# Altium PCB PBC2Asave.PcbDoc (part 2 of 2)
Units mm, origin at the board's own origin, x right, y up, seen from the top; angles counter-clockwise.
Board outline 55 x 64.5 mm, 2 copper layers (Top Layer, Bottom Layer); 77 components, 67 nets, 232 pads, 40 vias.
Unrouted connection lines stored in the file: 2.
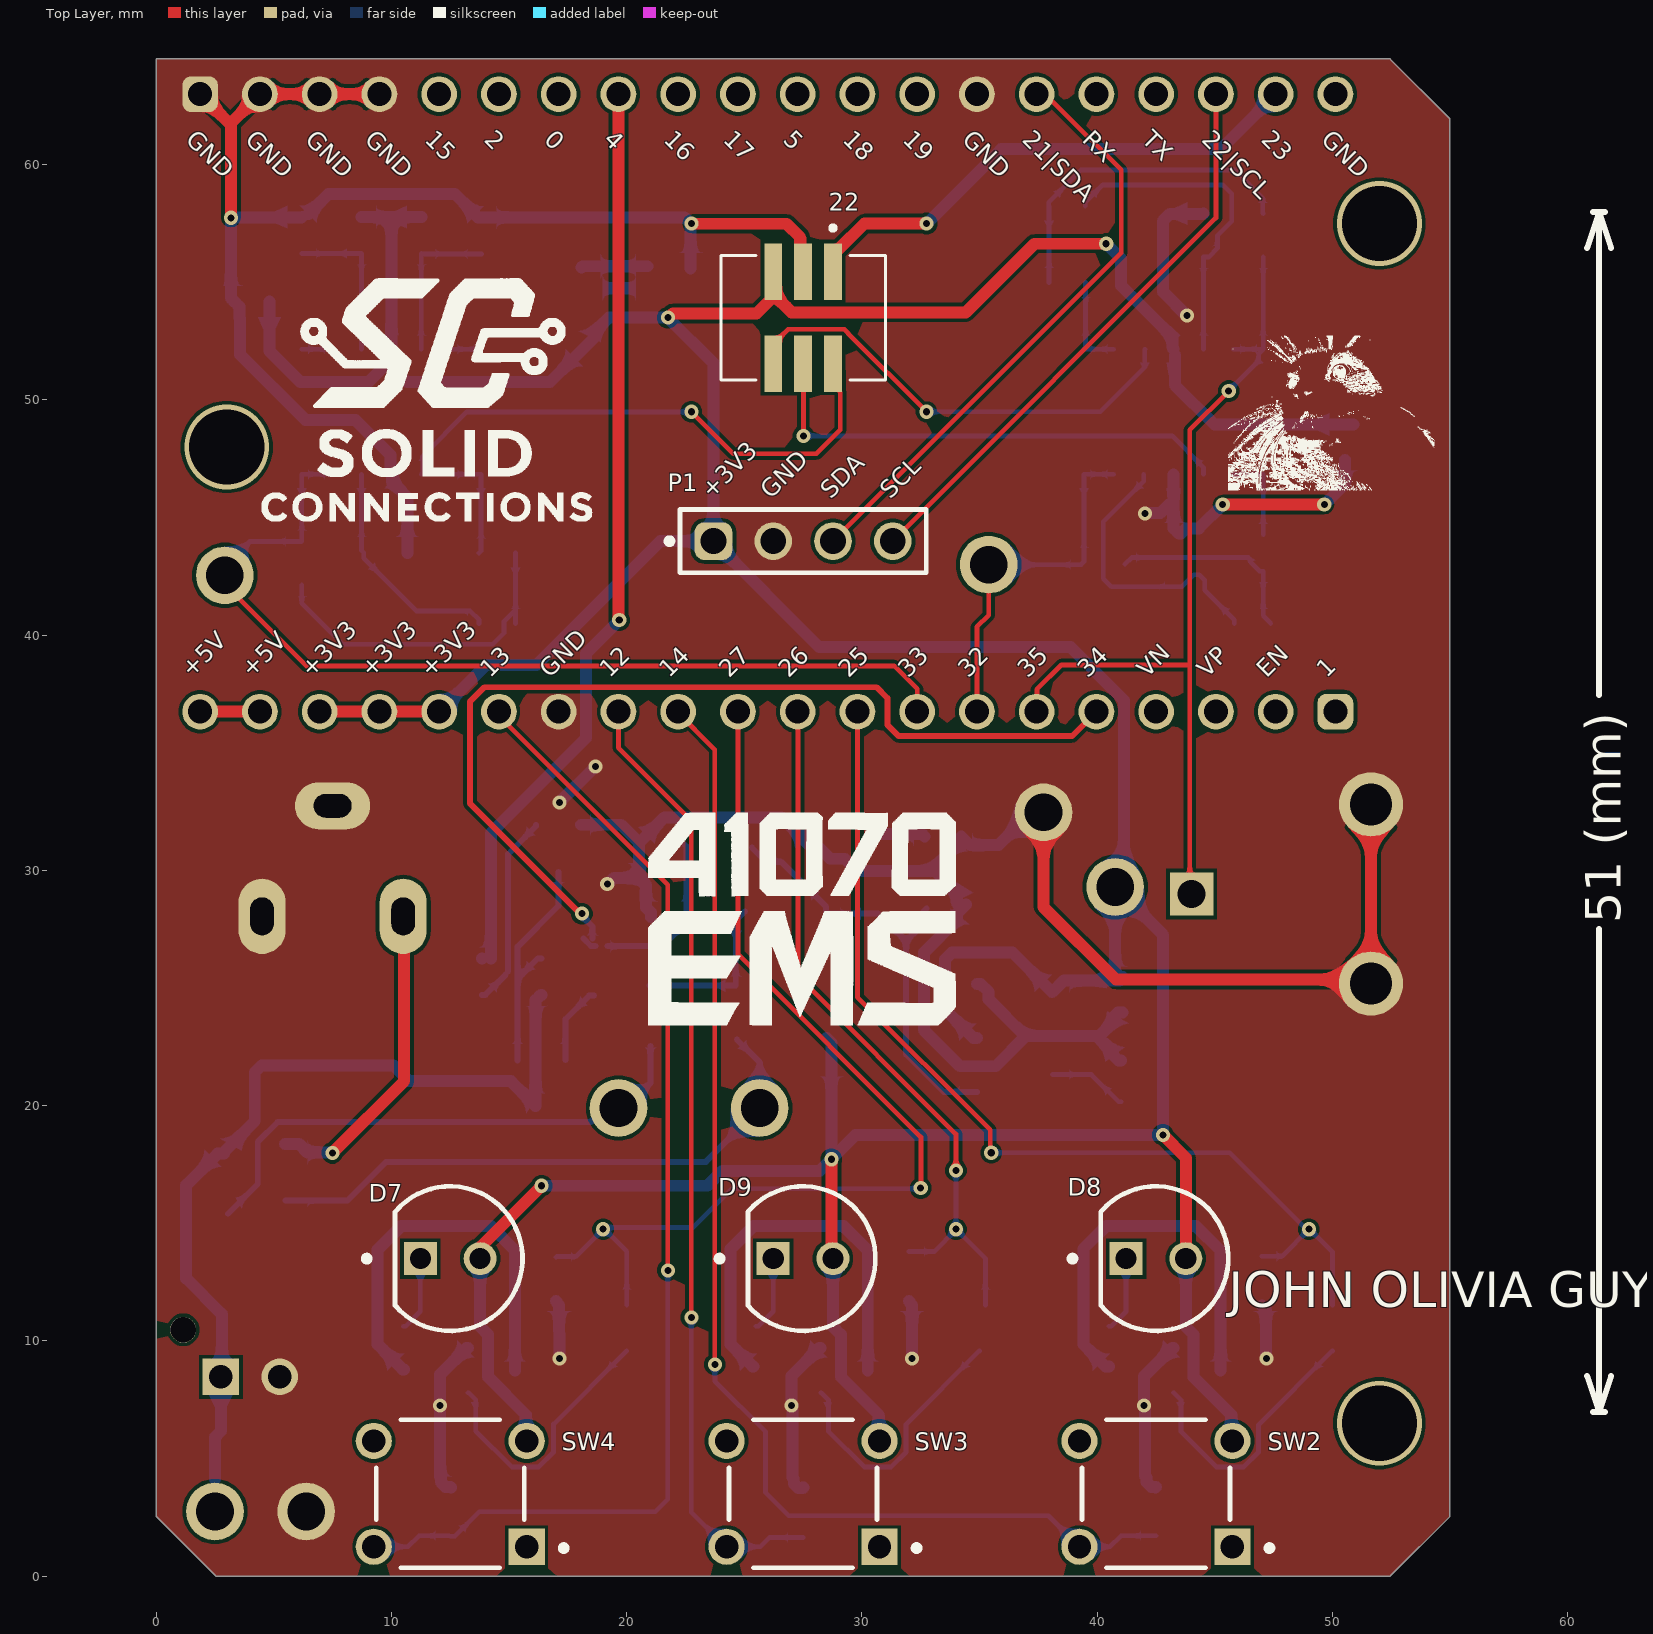
[diagram p0: Top Layer view]

## Via types
v1: diameter 0.6, hole 0.3, Top Layer to Bottom Layer, 37 vias
v2: diameter 3.6, hole 3.2, Top Layer to Bottom Layer, 3 vias

## Nets (pads, with @x,y where several pads share a name; then routed paths per layer and width w, separated by ;. In a path a pad name is that pad's centre, name@x,y a point inside that pad or via, vN(x,y) a via of type N, cw(c..) or ccw(c..) an arc to the next point about the centre after c; other vN are vias at no path point) (continued)
NetJ6_1: (continued)
  Bottom Layer w0.508: SW1.5@5.473,18.376 6.071,18.376 6.435,18.013 7.475,18.013 v1(7.493,17.995)
NetQ1_1: Q1.1 Q2.3 R14.2 | length 10.1
  Bottom Layer w0.254: Q1.1@15.367,21.927 15.367,25.402 ; R14.2 16.229,26.264 15.367,25.402 ; Q2.3 17.102,28.493 15.367,26.758 15.367,25.402
NetQ1_2: Q1.2 R15.1 | length 3.4
  Bottom Layer w0.254: Q1.2@17.399,21.943 17.399,23.676 18.405,24.682 R15.1@18.605,24.682
NetQ2_1: Q2.1 R16.2 | length 8.1
  Bottom Layer w0.254: R16.2 13.997,24.712 14.859,25.574 ; 14.961,25.712 14.961,30.702 16.152,31.893 Q2.1
NetQ3_1: Q3.1 R19.2 | length 11.6
  Bottom Layer w0.203: Q3.1 13.291,7.8 13.589,7.502 13.589,6.168 15.113,4.644 16.256,4.644 16.891,5.279 16.891,6.466 R19.2
NetQ3_3: Q3.3 R18.2 | length 17.4
  Bottom Layer w0.508: R18.2@10.541,8.791 10.479,8.791 9.413,9.858 9.413,13.886 10.414,14.887 14.224,14.887 15.25,13.861 Q3.3
NetQ4_1: Q4.1 R22.2 | length 11.6
  Bottom Layer w0.203: Q4.1 43.263,7.8 43.561,7.502 43.561,6.152 45.069,4.644 46.228,4.644 46.863,5.279 46.863,6.438 R22.2
NetQ4_3: Q4.3 R21.2 | length 17.3
  Bottom Layer w0.508: R21.2@40.513,8.918 40.352,8.918 39.413,9.858 39.413,13.914 40.386,14.887 44.196,14.887 45.25,13.833 Q4.3
NetQ5_1: Q5.1 R27.2 | length 11.6
  Bottom Layer w0.203: Q5.1 28.277,7.8 28.575,7.502 28.575,6.168 30.099,4.644 31.242,4.644 31.877,5.279 31.877,6.459 34.993,9.575 R27.2
NetQ5_3: Q5.3 R25.2 | length 17.2
  Bottom Layer w0.508: R25.2@25.4,8.918 25.352,8.918 24.413,9.858 24.413,13.9 25.4,14.887 29.21,14.887 30.25,13.847 Q5.3
NetR2_2: R2.2 R5.1 U1.10 | length 6.6
  Bottom Layer w0.203: R5.1 R2.2 U1.10
NetR3_1: R3.1 U1.1 U1.2 | length 4.6
  Bottom Layer w0.203: U1.2 U1.1 13.81,43.586 R3.1
NetR6_2: R6.2 R7.1 U1.12 | length 6.6
  Bottom Layer w0.203: U1.12 R6.2 11.286,56.208 R7.1
NetR8_1: R8.1 U2.1 U2.2 | length 3.8
  Bottom Layer w0.203: U2.2 U2.1 R8.1
NetR10_1: R10.1 U2.8 U2.9 | length 4.1
  Bottom Layer w0.203: R10.1 39.511,52.231 U2.8 U2.9
NetU1_8: U1.8 U1.9 | length 1.3
  Bottom Layer w0.203: U1.8 U1.9
NetU1_13: U1.13 U1.14 | length 1.3
  Bottom Layer w0.203: U1.13 U1.14
RX: J12.16
TX: J12.17
VN: J11.4
VP: J11.3
X: 22.2 U1.3 | length 23.4
  Top Layer w0.203: v1(22.75,49.5) 24.537,47.713 28.067,47.713 29.083,48.729 29.083,50.333 29.048,50.367 29.048,51.272 22.2
  Bottom Layer w0.203: U1.3 11.333,46.903 11.333,47.616 13.208,49.491 v1@22.733,49.491
Y: 22.4 U2.3 | length 21
  Top Layer w0.203: 22.4@27.5,51.534 27.52,51.514 v1(27.52,48.475)
  Bottom Layer w0.203: v1@27.432,48.475 43.185,48.475 44.52,47.14 U2.3
Z: 22.6 U2.10 | length 19.9
  Top Layer w0.203: 22.6@26.162,51.523 26.162,52.302 26.864,53.004 29.255,53.004 29.404,52.855 29.404,52.846 v1(32.75,49.5)
  Bottom Layer w0.203: v1(32.75,49.5) 40.141,49.5 42.025,51.384 42.025,52.146 U2.10@42.037,52.158
pads on no net: J8. J11.1 J12.20 SW1.3 SW1.6 SW2.1 SW2.4 SW3.1 SW3.4 SW4.1 SW4.4
copper on no net:
  other v2: 52,6.5 3,48 52,57.5

## Polygon pours and split planes (outlines as drawn)
GND on Top Layer "GND_L01_P004" (solid, pour order 4): 2.54,0 0,2.54 0,64.5 52.451,64.5 54.975,61.976 55,61.976 54.991,2.54 52.451,0

## Silkscreen, mask and mechanical layers (free items; w line width, h text height)
Top Overlay:
  drawing of 2224 lines, arcs and shapes, not listed
  text "GND" at 1.214,61.029 h0.75 r315
  text "GND" at 3.754,61.029 h0.75 r315
  text "GND" at 6.294,61.029 h0.75 r315
  text "GND" at 8.834,61.029 h0.75 r315
  text "15" at 11.374,61.029 h0.75 r315
  text "2" at 13.914,61.029 h0.75 r315
  text "0" at 16.454,61.029 h0.75 r315
  text "4" at 18.994,61.029 h0.75 r315
  text "16" at 21.534,61.029 h0.75 r315
  text "17" at 24.074,61.029 h0.75 r315
  text "5" at 26.614,61.029 h0.75 r315
  text "18" at 29.154,61.029 h0.75 r315
  text "19" at 31.694,61.029 h0.75 r315
  text "GND" at 34.234,61.029 h0.75 r315
  text "21|SDA" at 36.774,61.029 h0.75 r315
  text "RX" at 39.314,61.029 h0.75 r315
  text "TX" at 41.854,61.029 h0.75 r315
  text "22|SCL" at 44.394,61.029 h0.75 r315
  text "23" at 46.934,61.029 h0.75 r315
  text "GND" at 49.474,61.029 h0.75 r315
  text "+3V3" at 23.592,45.761 h0.75 r45
  text "GND" at 26.132,45.761 h0.75 r45
  text "SDA" at 28.672,45.761 h0.75 r45
  text "SCL" at 31.212,45.761 h0.75 r45
  text "+5V" at 1.494,38.141 h0.75 r45
  text "+5V" at 4.034,38.141 h0.75 r45
  text "+3V3" at 6.574,38.141 h0.75 r45
  text "+3V3" at 9.114,38.141 h0.75 r45
  text "+3V3" at 11.654,38.141 h0.75 r45
  text "13" at 14.194,38.141 h0.75 r45
  text "GND" at 16.734,38.141 h0.75 r45
  text "12" at 19.274,38.141 h0.75 r45
  text "14" at 21.814,38.141 h0.75 r45
  text "27" at 24.354,38.141 h0.75 r45
  text "26" at 26.894,38.141 h0.75 r45
  text "25" at 29.434,38.141 h0.75 r45
  text "33" at 31.974,38.141 h0.75 r45
  text "32" at 34.514,38.141 h0.75 r45
  text "35" at 37.054,38.141 h0.75 r45
  text "34" at 39.594,38.141 h0.75 r45
  text "VN" at 42.134,38.141 h0.75 r45
  text "VP" at 44.674,38.141 h0.75 r45
  text "EN" at 47.214,38.141 h0.75 r45
  text "1" at 49.754,38.141 h0.75 r45
  text "51 (mm)" at 62.255,27.765 h1.52 r90
  text "JOHN OLIVIA GUY YUTO" at 45.596,11.43 h1.52
Bottom Overlay:
  drawing of 7 lines, arcs and shapes, not listed

## Dimensions
3,48 to 52,57.5 on Top Overlay